# EAGLE board vocore_badge (EAGLE 7.2.0)
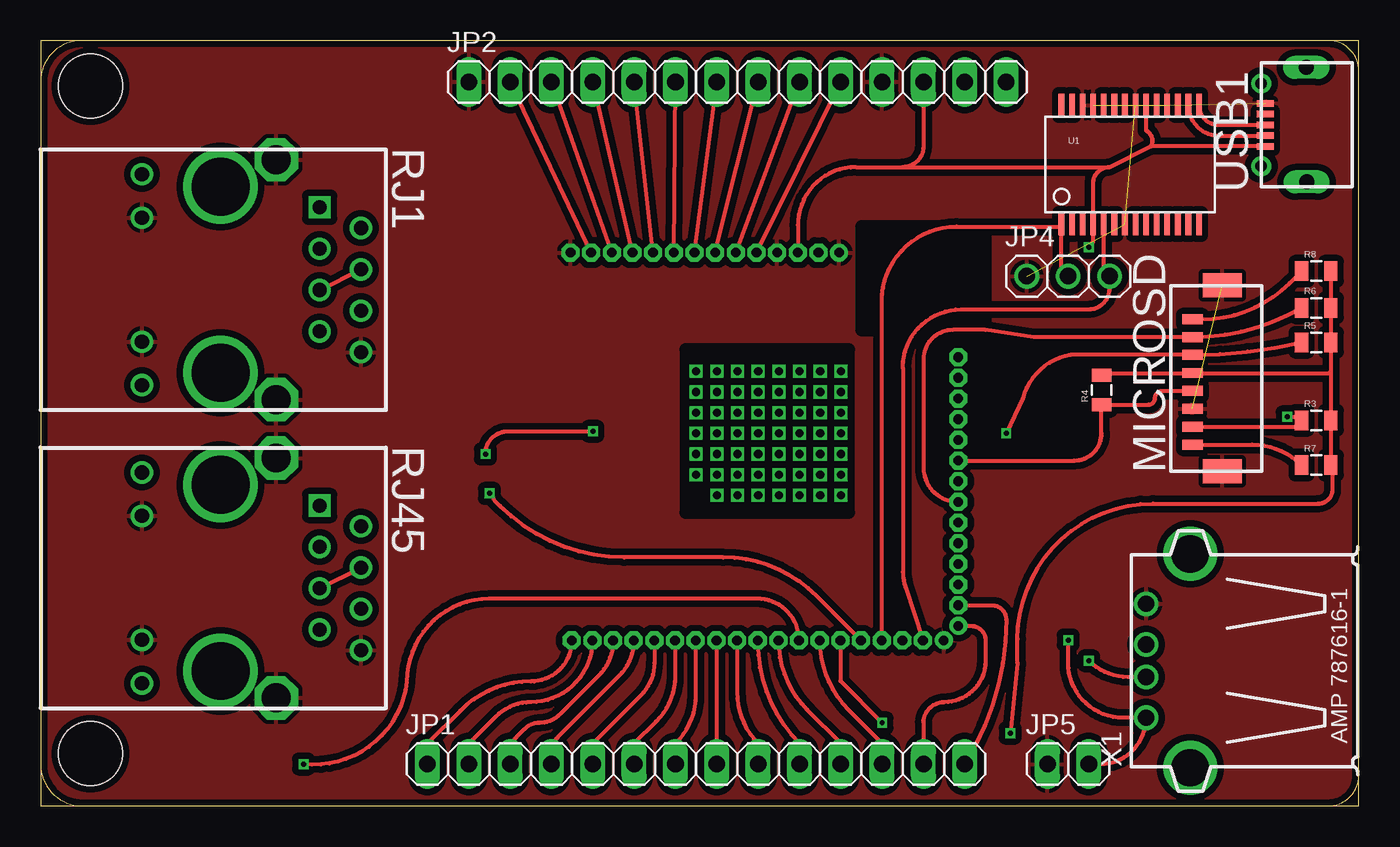
[diagram p0: board, top side]
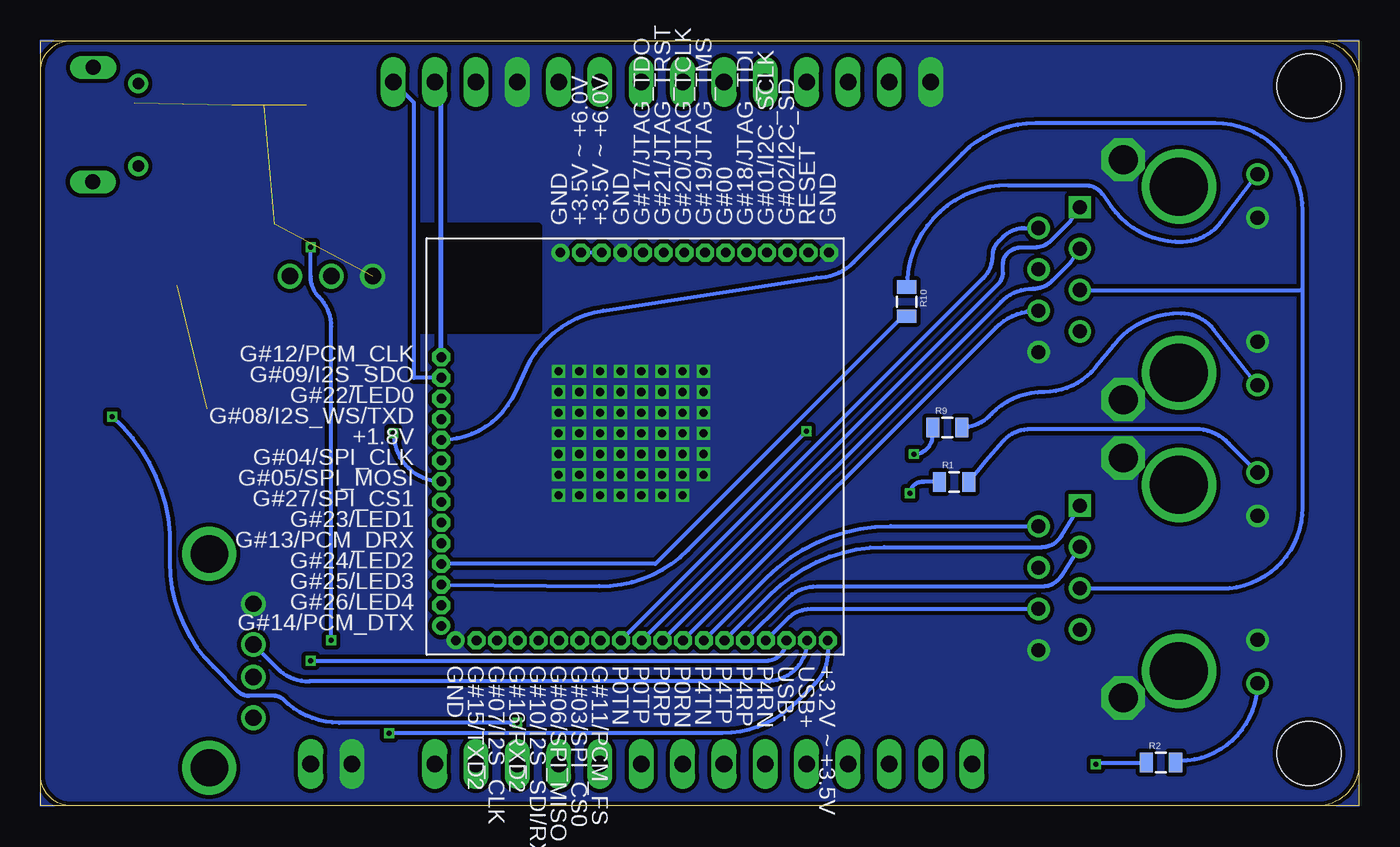
[diagram p1: board, bottom side, seen from below]

Size 81 x 47 mm. Coordinates in mm from the lower left corner, seen from the top.
Outline: 2.53,0 79.13,0 arc90 81,1.87 81,45.15 arc90 79.15,47 2.52,47 arc90 0,44.48 0,2.53 arc90 2.53,0
Copper layers (1*16): Top 0.035mm / dielectric 1.5mm / Bottom 0.035mm
Design rules "ITEADstudio_DRC *": minimum track width 6mil, minimum drill 12mil, track to track 6mil, track to pad 6mil, pad to pad 6mil, via to via 6mil, smd to smd 0mil, copper to edge 10mil, drill to drill 10mil, minimum pad ring 10mil, minimum via ring 6mil, stop-mask expansion 2mil, vias tented up to drill 100mil, thermal gap 10mil
Net classes: 0 default: width 0.254 mm, clearance 0.152 mm
Holes 3.94 mm at 3.06,44.21 3.06,3.21
tRestrict: area 39.6,18 to 49.6,28; area 50.4,29.2 to 58.1,35.6
bRestrict: area 50.4,30.5 to 58.1,35.6; area 50.4,30.5 to 58.1,35.6; area 50.4,29.2 to 58.1,34.3
Milling: 4 lines

## Footprints (pad centres in the part's own frame; a part is rotated, then mirrored left to right if it is on the bottom)
1X14 = drill 1.016 long: 1 -16.51,0; 2 -13.97,0; 3 -11.43,0; 4 -8.89,0; 5 -6.35,0; 6 -3.81,0; 7 -1.27,0; 8 1.27,0; 9 3.81,0; 10 6.35,0; 11 8.89,0; 12 11.43,0; 13 13.97,0; 14 16.51,0
1X03 = drill 1.016: 1 -2.54,0; 2 0,0; 3 2.54,0
1X02 = drill 1.016 long: 1 -1.27,0; 2 1.27,0
MICROSD_PADS_1PRIMARY = smd 0.61 x 1.245: 1 9.347,-1.321; 2 8.255,-1.321; 3 7.163,-1.321; 4 6.045,-1.321; 5 4.953,-1.321; 6 3.861,-1.321; 7 2.743,-1.321; 8 1.651,-1.321 | smd 1.473 x 2.413: 9 0,-3.15; 10 11.43,-3.15
0805 = smd 0.8 x 1.2: 1 -0.9,0; 2 0.9,0
RJ45ALED_1PRIMARY = drill 0.864 pad 1.27 square: 1 3.556,17.145 | drill 0.864 pad 1.27: 2 4.826,19.685; 3 6.096,17.145; 4 7.366,19.685; 5 8.636,17.145; 6 9.906,19.685; 7 11.176,17.145; 8 12.446,19.685; 9 1.524,6.223; 10 4.191,6.223; 11 14.478,6.223; 12 11.811,6.223 | drill 3.556 pad 3.81: 13 13.716,11.049; 14 2.286,11.049 | drill 1.778 pad 1.372 octagon: 15 0.635,14.478; 16 15.367,14.478
SSOP28DB = smd 0.348 x 1.397: 1 -4.225,-3.656; 2 -3.575,-3.656; 3 -2.925,-3.656; 4 -2.275,-3.656; 5 -1.625,-3.656; 6 -0.975,-3.656; 7 -0.325,-3.656; 8 0.325,-3.656; 9 0.975,-3.656; 10 1.625,-3.656; 11 2.275,-3.656; 12 2.925,-3.656; 13 3.575,-3.656; 14 4.225,-3.656; 15 4.225,3.656; 16 3.575,3.656; 17 2.925,3.656; 18 2.275,3.656; 19 1.625,3.656; 20 0.975,3.656; 21 0.325,3.656; 22 -0.325,3.656; 23 -0.975,3.656; 24 -1.625,3.656; 25 -2.275,3.656; 26 -2.925,3.656; 27 -3.575,3.656; 28 -4.225,3.656
VOCORE_DOC_CUSTOM = drill 0.6 pad 0.889: PB00 1.778,0.889; PL14 0.889,1.778; PT01 8.204,24.714 | drill 0.6 pad 0.889 octagon: PB01 3.048,0.889; PB02 4.318,0.889; PB03 6.858,0.889; PB04 5.588,0.889; PB05 8.128,0.889; PB06 9.398,0.889; PB07 10.668,0.889; PB08 11.938,0.889; PB09 13.208,0.889; PB10 14.478,0.889; PB11 15.748,0.889; PB12 17.018,0.889; PB13 18.288,0.889; PB14 19.558,0.889; PB15 20.828,0.889; PB16 22.098,0.889; PB17 23.368,0.889; PB18 24.638,0.889; PL01 0.889,18.288; PL02 0.889,17.018; PL03 0.889,15.748; PL04 0.889,14.478; PL05 0.889,13.208; PL06 0.889,11.938; PL07 0.889,10.668; PL08 0.889,9.398; PL10 0.889,6.858; PL11 0.889,5.588; PL12 0.889,4.318; PL13 0.889,3.048; PLO9 0.889,8.128; PT02 10.744,24.714; PT03 9.474,24.714; PT04 12.014,24.714; PT05 13.284,24.714; PT06 14.554,24.714; PT07 15.824,24.714; PT08 17.094,24.714; PT09 18.364,24.714; PT10 19.634,24.714; PT11 20.904,24.714; PT12 22.174,24.714; PT13 23.444,24.714; PT14 24.714,24.714
USB_MICRO_A_1PRIMARY = smd 0.406 x 1.016: 1 2.489,-0.254; 2 3.15,-0.254; 3 3.81,-0.254; 4 5.131,-0.254; 5 4.47,-0.254 | drill 0.711 pad 1.016: 6 1.27,0; 7 6.35,0 | drill 0.914 pad 1.168 long: 8 0.305,-2.794; 9 7.341,-2.769
USB = drill 1: 1 -3.5,12.99; 2 -1,12.99; 3 1,12.99; 4 3.5,12.99 | drill 2.3: GND@0 6.57,10.28; GND@1 -6.57,10.28

## Placement (x,y rotation side)
JP1  [1X14]  40.28,2.56 0 top
JP2  [1X14]  42.82,44.47 0 top
JP4  [1X03]  63.14,32.53 0 top
JP5  [1X02]  63.14,2.56 0 top
MICROSD  MICROSD_PADS  [MICROSD_PADS_1PRIMARY]  69.46,20.54 90 top
R1  150R  [0805]  24.86,19.9 0 bottom
R2  150  [0805]  12.16,2.66 0 bottom
R3  20K  [0805]  78.38,23.68 0 top
R4  20K  [0805]  65.19,25.54 90 top
R5  20K  [0805]  78.38,28.47 0 top
R6  20K  [0805]  78.38,30.59 0 top
R7  20K  [0805]  78.38,20.93 0 top
R8  20K  [0805]  78.38,32.85 0 top
R9  150  [0805]  25.29,23.24 0 bottom
R10  150R  [0805]  27.78,30.97 270 bottom
RJ1  RJ45ALED  [RJ45ALED_1PRIMARY]  0,40.32 270 top
RJ45  RJ45ALED  [RJ45ALED_1PRIMARY]  0,22 270 top
U1  FT232RL-BASICSSOP  [SSOP28DB]  66.95,39.39 0 top
U$1  VOCORE_SHIELD  [VOCORE_DOC_CUSTOM]  57.27,9.27 0 bottom
USB1  USB_MICRO_A  [USB_MICRO_A_1PRIMARY]  75,38.02 90 top
X1  [USB]  80.92,8.91 90 top

## Library data of the parts
JP1 JP2 JP4 = adafruit
JP5 = pinhead
MICROSD RJ1 RJ45 USB1 = vocore_dock
R1-R10 = SparkFun-Resistors
U1 = SparkFun
U$1 = Vocore
X1 = con-amp

## Nets
5: X1.GND@0
6: X1.GND@1
+1.8V: RJ1.4 RJ1.5 RJ45.4 RJ45.5 U$1.PL05
+3.3V: JP1.1 MICROSD.4 R3.2 R4.2 R5.2 R6.2 R7.2 R8.2 U$1.PB18
+5V: JP2.12 JP5.2 U1.4 U1.20 U$1.PT02 U$1.PT03 USB1.1 X1.1
G#00: JP2.6 U$1.PT09
GND: JP2.1 JP2.11 JP4.1 JP5.1 MICROSD.6 MICROSD.9 MICROSD.10 RJ1.8 RJ1.10 RJ1.12 RJ1.15 RJ1.16 RJ45.8 RJ45.10 RJ45.12 RJ45.15 RJ45.16 U1.7 U1.18 U1.21 U1.25 U1.26 U$1.PB00 U$1.PT01 U$1.PT04 U$1.PT14 USB1.4 X1.4
I2C_CLK: JP2.4 U$1.PT11
I2C_SD: JP2.3 U$1.PT12
I2S_CLK: U$1.PB02
I2S_SDO: JP2.14 U$1.PL02
I2S_WS/TXD: U$1.PL04
JTAG_TCLK: JP2.8 U$1.PT07
JTAG_TDI: JP2.5 U$1.PT10
JTAG_TDO: JP2.10 U$1.PT05
JTAG_TMS: JP2.7 U$1.PT08
JTAG_TRST: JP2.9 U$1.PT06
LED0: U$1.PL03
LED1: U$1.PLO9
LED2: R10.2 U$1.PL11
LED3: R9.1 U$1.PL12
LED4: JP1.14 U$1.PL13
LED_G: R1.2 RJ45.9
LED_Y: R2.2 RJ45.11
N$1: R9.2 RJ1.11
N$4: R10.1 RJ1.9
P0RN: JP1.8 RJ1.6 U$1.PB11
P0RP: JP1.9 RJ1.3 U$1.PB10
P0TN: JP1.11 RJ1.2 U$1.PB08
P0TP: JP1.10 RJ1.1 U$1.PB09
P4RN: JP1.4 RJ45.6 U$1.PB15
P4RP: JP1.5 RJ45.3 U$1.PB14
P4TN: JP1.7 RJ45.2 U$1.PB12
P4TP: JP1.6 RJ45.1 U$1.PB13
PCM_CLK: JP2.13 U$1.PL01
PCM_DRX: U$1.PL10
PCM_TDX: JP1.13 U$1.PL14
RESET: JP2.2 U$1.PT13
RXD2: JP4.2 U1.1 U$1.PB04
SPI_CLK: MICROSD.5 R4.1 U$1.PL06
SPI_CS0: JP1.12 U$1.PB06
SPI_CS1: MICROSD.2 R6.1 U$1.PL08
SPI_MISO: MICROSD.7 R3.1 U$1.PB05
SPI_MOSI: MICROSD.3 R5.1 U$1.PL07
SPI_RSV1: MICROSD.8 R7.1
SPI_RSV2: MICROSD.1 R8.1
TXD2: JP4.3 U1.5 U$1.PB01
UARTF_DTR: R2.1 U$1.PB07
UARTF_RXD: R1.1 U$1.PB03
USB_M: JP1.3 U$1.PB16 X1.2
USB_P: JP1.2 U$1.PB17 X1.3
USBDM: U1.16 USB1.2
USBDP: U1.15 USB1.3

## Tracks (layer width: path | path; a pad name or v marks a point on that pad's centre or on a via)
+1.8V
  Top 0.254: RJ45.5 RJ45.4 | RJ1.5 RJ1.4
  Bottom 0.254: 3.45,31.77 3.45,36.54 arc-90 8.84,41.93 19.87,41.93 arc-45 24.36,40.07 31.05,33.39 arc45 33.31,32.45 46.42,30.42 arc-57 51.17,26.83 51.82,25.41 arc65 56.36,22.5 U$1.PL05 | 3.45,31.77 3.45,18.32 arc90 8.41,13.36 RJ45.5 arc90 RJ45.5 | RJ1.5 3.54,31.68 3.45,31.77
+3.3V  (via drill 0.3)
  Top 0.254: U$1.PB18 arc-90 30.11,7.64 arc45 25.79,5.85 23.77,3.83 JP1.1 | R8.2 R6.2 R5.2 79.28,26.69 | 79.28,26.69 R3.2 R7.2 arc-90 79.4,20.81 79.4,19.45 arc-90 78.51,18.56 68.35,18.56 arc90 60.03,10.24 60.03,8.77 v59.58,4.46 | 79.28,26.69 79.15,26.56 70.8,26.56 arc-90 MICROSD.4 65.33,26.59 R4.2
  Bottom 0.254: U$1.PB18 32.63,9.4 arc45 33.41,7.53 34.6,6.33 arc45 39.11,4.46 v59.58,4.46
+5V  (via drill 0.3)
  Top 0.254: USB1.1 68.22,40.51 | U$1.PT02 46.53,35.68 arc-90 50.09,39.24 52.98,39.24 | v63.14,10.18 63.14,8.79 arc90 66.52,5.41 X1.1 arc-90 65.08,2.56 JP5.2 | 52.98,39.24 65.68,39.24 | 65.68,39.24 68.22,40.51 | v64.41,34.31 64.56,34.47 arc45 64.67,34.73 U1.4 64.67,38.23 arc-90 65.68,39.24 | U1.20 67.92,41.48 arc-90 68.22,40.51 | JP2.12 54.25,40.51 arc-90 52.98,39.24
  Bottom 0.254: U$1.PT03 U$1.PT02 46.55,33.97 | v63.14,10.18 63.14,29.45 arc-45 63.88,31.24 arc45 64.41,32.51 v64.41,34.31
G#00
  Top 0.254: U$1.PT09 JP2.6
GND  (via drill 0.5)  (6 unrouted)
  other vias: 47.9,20.34 46.63,20.34 45.36,20.34 44.09,20.34 42.82,20.34 42.82,21.61 44.09,21.61 45.36,21.61 46.63,21.61 47.9,21.61 47.9,22.88 46.63,22.88 45.36,22.88 44.09,22.88 42.82,22.88 42.82,24.15 44.09,24.15 45.36,24.15 46.63,24.15 47.9,24.15 47.9,25.42 46.63,25.42 45.36,25.42 44.09,25.42 42.82,25.42 41.55,25.42 40.28,25.42 40.28,24.15 41.55,24.15 41.55,22.88 40.28,22.88 40.28,21.61 41.55,21.61 40.28,20.34 41.55,20.34 40.28,26.69 41.55,26.69 42.82,26.69 44.09,26.69 45.36,26.69 46.63,26.69 47.9,19.07 46.63,19.07 45.36,19.07 44.09,19.07 42.82,19.07 41.55,19.07 47.9,26.69 49.17,26.69 49.17,25.42 49.17,24.15 49.17,22.88 49.17,21.61 49.17,20.34 49.17,19.07
  pour Bottom (isolate 0.254, no thermals): 81,47 0,47 0,0 81,0
  pour Top (isolate 0.4): 0,47 81,47 81,0 0,0
I2C_CLK
  Top 0.254: U$1.PT11 JP2.4
I2C_SD
  Top 0.254: U$1.PT12 JP2.3
I2S_SDO
  Bottom 0.254: U$1.PL02 58.06,26.29 58.06,43.2 JP2.14
JTAG_TCLK
  Top 0.254: U$1.PT07 JP2.8
JTAG_TDI
  Top 0.254: U$1.PT10 JP2.5
JTAG_TDO
  Top 0.254: U$1.PT05 JP2.10
JTAG_TMS
  Top 0.254: U$1.PT08 JP2.7
JTAG_TRST
  Top 0.254: U$1.PT06 JP2.9
LED2
  Bottom 0.254: R10.2 28.01,30.07 43.22,14.86 U$1.PL11
LED3  (via drill 0.3)
  Top 0.254: v27.33,21.61 arc-90 28.72,23.01 v33.93,23.01
  Bottom 0.254: U$1.PL12 46.67,13.49 arc-46 41.22,15.72 v33.93,23.01 | v27.33,21.61 arc-90 26.19,22.75 R9.1
LED4
  Top 0.254: U$1.PL13 58.46,12.32 arc-90 59.33,11.45 arc-32 JP1.14
LED_G
  Bottom 0.254: RJ45.9 7.81,22.06 arc-45 9.79,23.13 20.19,23.13 arc-49 21.91,22.35 22.94,21.17 R1.2
LED_Y
  Bottom 0.254: R2.2 arc-45 10.96,2.78 arc-90 RJ45.11
N$1
  Bottom 0.254: RJ1.11 8.91,29.25 arc-53 10.93,30.25 arc-53 15.1,28.27 16.21,26.9 arc51 19.33,25.42 arc-45 22.57,24.08 22.72,23.93 arc45 R9.2
N$4
  Bottom 0.254: RJ1.9 8.46,35.87 arc51 10.83,34.65 arc56 15.23,36.83 15.77,37.59 arc-54 16.8,38.12 21.53,38.12 arc-90 R10.1
P0RN
  Top 0.254: U$1.PB11 41.52,2.59 JP1.8
  Bottom 0.254: U$1.PB11 22.31,29.37 arc45 19.79,30.41 RJ1.6
P0RP
  Top 0.254: U$1.PB10 42.79,6.96 arc45 44.09,3.83 JP1.9
  Bottom 0.254: U$1.PB10 22.01,30.95 arc45 20.01,31.77 arc-45 18.84,32.26 17.7,33.4 RJ1.3
P0TN
  Top 0.254: U$1.PB08 arc45 47.09,5.91 49.17,3.83 JP1.11
  Bottom 0.254: U$1.PB08 23.06,32.43 arc-45 22.5,33.78 arc45 22.13,34.68 21.84,34.97 arc45 20.57,35.49 RJ1.2
P0TP
  Top 0.254: U$1.PB09 44.06,10.03 arc45 46.63,3.83 JP1.10
  Bottom 0.254: U$1.PB09 22.14,32.08 arc-45 21.87,32.74 21.87,33.3 arc45 21.6,33.94 arc45 20.7,34.31 19.91,34.31 arc-45 18.91,34.73 17.7,35.94 RJ1.1
P4RN
  Top 0.254: U$1.PB15 arc-45 35.54,7.98 31.76,4.2 arc45 31.39,3.3 JP1.4
  Bottom 0.254: U$1.PB15 35.08,11.52 arc45 33.7,12.09 RJ45.6
P4RP
  Top 0.254: U$1.PB14 37.71,8.78 arc-45 36.88,6.78 33.93,3.83 JP1.5
  Bottom 0.254: U$1.PB14 35.17,12.7 arc45 33.28,13.48 19.44,13.48 arc-57 18.29,14.11 RJ45.3
P4TN
  Top 0.254: U$1.PB12 40.25,6.83 arc-45 39.01,3.83 JP1.7
  Bottom 0.254: U$1.PB12 36.39,14.02 arc45 28.77,17.17 RJ45.2
P4TP
  Top 0.254: U$1.PB13 38.98,8 arc-45 37.81,5.17 36.47,3.83 JP1.6
  Bottom 0.254: U$1.PB13 36.13,13.01 arc45 29.17,15.89 19.49,15.89 arc-59 18.28,16.58 RJ45.1
PCM_CLK
  Bottom 0.254: 56.38,44.06 JP2.13
  Bottom 0.305: U$1.PL01 56.38,44.06
PCM_TDX
  Top 0.254: U$1.PL14 57.19,11.05 arc-90 58.06,10.18 58.06,8.91 arc-90 55.52,6.37 arc90 54.25,5.1 JP1.13
RESET
  Top 0.254: U$1.PT13 JP2.2
RXD2
  Top 0.254: U$1.PB04 51.68,30.98 arc-90 56.28,35.58 62.57,35.58 U1.1 62.73,33.04 JP4.2
SPI_CLK
  Top 0.254: MICROSD.5 68.93,25.49 arc90 68.47,25.04 arc-90 68.08,24.64 R4.1 65.19,22.88 arc-90 63.52,21.21 U$1.PL06
SPI_CS0
  Top 0.254: U$1.PB06 arc45 49.63,5.91 51.71,3.83 JP1.12
SPI_CS1
  Top 0.254: U$1.PL08 56.36,18.69 56.33,18.69 arc-90 54.25,20.77 54.25,27.43 arc-90 56.05,29.23 58.06,29.23 61.04,28.79 MICROSD.2 arc30 R6.1
SPI_MISO  (via drill 0.3)
  Top 0.254: U$1.PB05 49.14,7.67 v51.71,5.1 | MICROSD.7 77.09,23.28 R3.1 77.26,23.9 v76.6,23.9
  Bottom 0.254: v51.71,5.1 62.64,5.1 arc45 66.1,6.53 arc-45 66.62,6.75 68.2,6.75 arc45 68.88,7.03 70.38,8.53 arc45 73.05,14.96 73.05,16.74 arc-45 v76.6,23.9
SPI_MOSI  (via drill 0.3)
  Top 0.254: v59.33,22.88 60.35,25.03 arc-65 63.3,27.7 MICROSD.3 arc13 R5.1
  Bottom 0.254: v59.33,22.88 59.27,22.46 arc-82 U$1.PL07
SPI_RSV1
  Top 0.254: MICROSD.8 74.43,22.19 arc-45 R7.1
SPI_RSV2
  Top 0.254: MICROSD.1 71.37,29.89 arc45 76.74,32.11 R8.1
TXD2
  Top 0.254: U$1.PB01 53.13,13.45 arc-18 52.98,14.36 52.98,26.91 arc-90 56.57,30.5 64.41,30.5 arc90 65.68,31.77 JP4.3 65.33,32.79 U1.5
UARTF_DTR  (via drill 0.3)
  Top 0.254: U$1.PB07 arc90 44.04,12.72 27.58,12.72 arc90 22.5,7.64 arc-90 v16.15,2.56
  Bottom 0.254: v16.15,2.56 arc90 16.05,2.66 R2.1
UARTF_RXD  (via drill 0.3)
  Top 0.254: U$1.PB03 47.68,12.89 arc45 41.96,15.26 35.85,15.26 arc-45 28.23,18.42 arc-45 27.71,19.23 v27.58,19.2
  Bottom 0.254: R1.1 26.75,19.9 arc-90 v27.58,19.2
USB_M  (via drill 0.3)
  Top 0.254: U$1.PB16 arc-45 34.27,7.98 31.92,5.63 arc-45 30.65,5.1 arc45 29.75,4.73 29.22,4.2 arc45 28.85,3.3 JP1.3 | X1.2 66.82,7.91 arc-45 v64.41,8.91
  Bottom 0.254: v64.41,8.91 36.42,8.91 arc-90 U$1.PB16
USB_P
  Top 0.254: U$1.PB17 arc-90 30.11,6.37 arc45 27.96,5.48 26.31,3.83 JP1.2
  Bottom 0.254: 33.93,10.13 U$1.PB17 arc90 36.42,7.64 64.49,7.64 arc45 66.49,8.47 X1.3
USBDM
  Top 0.254: U1.16 arc90 72.4,41.17 USB1.2
USBDP
  Top 0.254: U1.15 arc90 72.39,41.83 USB1.3

## Text on the board
tDocu: layerOne 2015